# EAGLE board CD40106-4069-Synth (EAGLE 7.6.0)
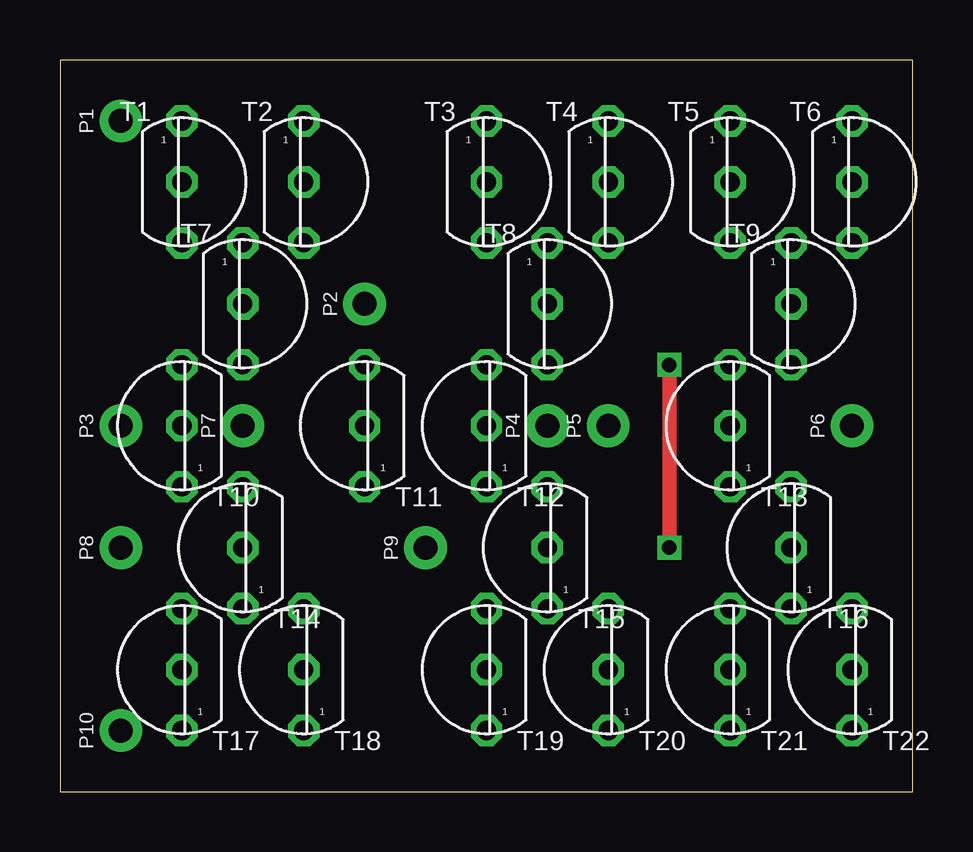
[diagram p0: board, top side]
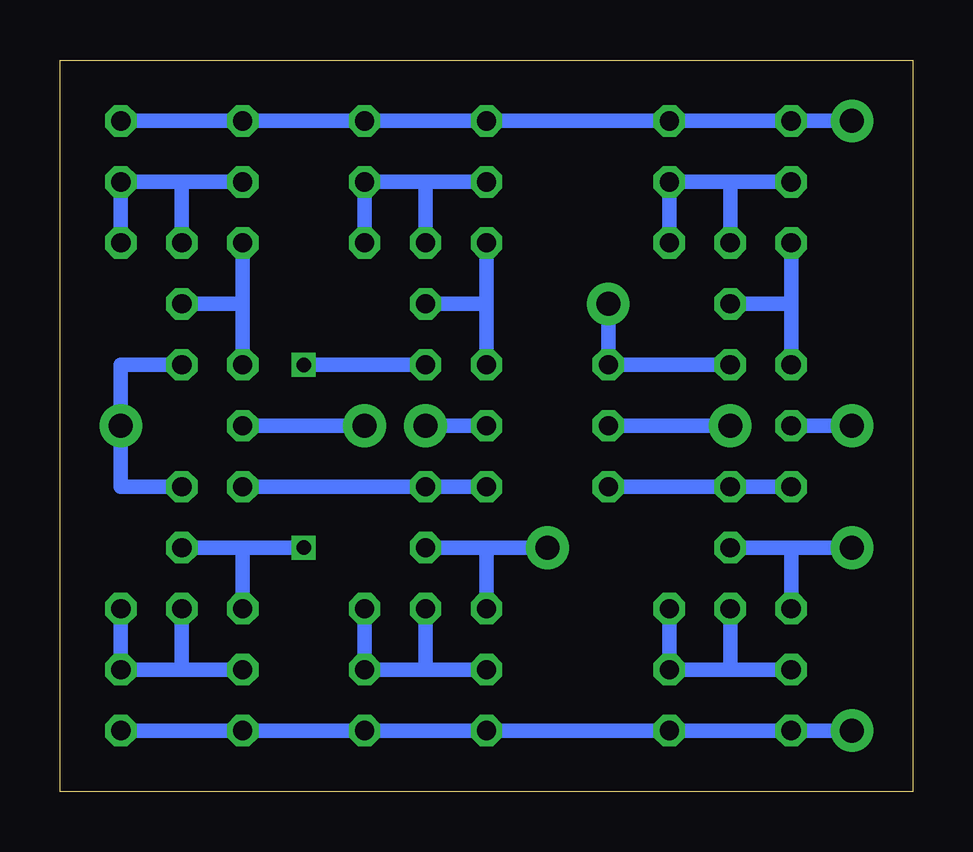
[diagram p1: board, bottom side, seen from below]

Size 35.56 x 30.48 mm. Coordinates in mm from the lower left corner, seen from the top.
Outline: 0,0 35.56,0 35.56,30.48 0,30.48 0,0
Copper layers (1*16): Top 0.035mm / dielectric 1.5mm / Bottom 0.035mm
Design rules "default": minimum track width 10mil, minimum drill 24mil, track to track 8mil, track to pad 8mil, pad to pad 8mil, via to via 8mil, smd to smd 8mil, copper to edge 40mil, drill to drill 8mil, minimum pad ring 10mil, minimum via ring 8mil, stop-mask expansion 4mil, vias tented up to drill 0mil, thermal gap 10mil

## Footprints (pad centres in the part's own frame; a part is rotated, then mirrored left to right if it is on the bottom)
SPAD = drill 1 pad 1.778: 1 0,0
TO92 = drill 0.8 octagon: 1 0,2.54; 2 0,0; 3 0,-2.54

## Placement (x,y rotation side)
P1  SPAD  [SPAD]  2.54,27.94 0 top
P2  SPAD  [SPAD]  12.7,20.32 0 top
P3  SPAD  [SPAD]  2.54,15.24 0 top
P4  SPAD  [SPAD]  20.32,15.24 0 top
P5  SPAD  [SPAD]  22.86,15.24 0 top
P6  SPAD  [SPAD]  33.02,15.24 0 top
P7  SPAD  [SPAD]  7.62,15.24 0 top
P8  SPAD  [SPAD]  2.54,10.16 0 top
P9  SPAD  [SPAD]  15.24,10.16 0 top
P10  SPAD  [SPAD]  2.54,2.54 0 top
T1  2N3906  [TO92]  5.08,25.4 0 top
T2  2N3906  [TO92]  10.16,25.4 0 top
T3  2N3906  [TO92]  17.78,25.4 0 top
T4  2N3906  [TO92]  22.86,25.4 0 top
T5  2N3906  [TO92]  27.94,25.4 0 top
T6  2N3906  [TO92]  33.02,25.4 0 top
T7  2N3906  [TO92]  7.62,20.32 0 top
T8  2N3906  [TO92]  20.32,20.32 0 top
T9  2N3906  [TO92]  30.48,20.32 0 top
T10  2N3904  [TO92]  5.08,15.24 180 top
T11  2N3904  [TO92]  12.7,15.24 180 top
T12  2N3904  [TO92]  17.78,15.24 180 top
T13  2N3904  [TO92]  27.94,15.24 180 top
T14  2N3904  [TO92]  7.62,10.16 180 top
T15  2N3904  [TO92]  20.32,10.16 180 top
T16  2N3904  [TO92]  30.48,10.16 180 top
T17  2N3904  [TO92]  5.08,5.08 180 top
T18  2N3904  [TO92]  10.16,5.08 180 top
T19  2N3904  [TO92]  17.78,5.08 180 top
T20  2N3904  [TO92]  22.86,5.08 180 top
T21  2N3904  [TO92]  27.94,5.08 180 top
T22  2N3904  [TO92]  33.02,5.08 180 top

## Library data of the parts
P1-P10 = pad
T1-T22 = t

## Nets
+15: P1.1 T1.1 T2.1 T3.1 T4.1 T5.1 T6.1
-15: P10.1 T17.1 T18.1 T19.1 T20.1 T21.1 T22.1
I_A: P8.1 T14.2 T17.3
I_B: P9.1 T15.2 T19.3
IN_A+: P3.1 T10.2
IN_A-: P7.1 T11.2
IN_B+: P5.1 T13.2
IN_B-: P4.1 T12.2
IO_A: P2.1 T7.3 T11.3
N$2: T1.2 T2.2 T2.3 T7.1
N$3: T1.3 T7.2 T10.3
N$5: T12.1 T13.1 T15.3
N$6: T3.2 T4.2 T4.3 T8.1
N$7: T3.3 T8.2 T12.3
N$8: T10.1 T11.1 T14.3
N$9: T8.3 T16.2 T21.3
N$10: T5.2 T6.2 T6.3 T9.1
N$11: T5.3 T9.2 T13.3
N$15: T14.1 T17.2 T18.2 T18.3
N$18: T15.1 T19.2 T20.2 T20.3
N$21: T16.1 T21.2 T22.2 T22.3
OB: P6.1 T9.3 T16.3

## Tracks (layer width: path | path; a pad name or v marks a point on that pad's centre or on a via)
+15
  Bottom 0.61: T6.1 T5.1 T4.1 T3.1 T2.1 T1.1 P1.1
-15
  Bottom 0.61: T22.1 T21.1 T20.1 T19.1 T18.1 T17.1 P10.1
I_A
  Bottom 0.61: P8.1 5.08,10.16 | T17.3 5.08,10.16 | 5.08,10.16 T14.2
I_B
  Bottom 0.61: P9.1 17.78,10.16 | T19.3 17.78,10.16 | 17.78,10.16 T15.2
IN_A+
  Bottom 0.61: P3.1 T10.2
IN_A-
  Bottom 0.61: P7.1 T11.2
IN_B+
  Bottom 0.61: P5.1 T13.2
IN_B-
  Bottom 0.61: P4.1 T12.2
IO_A
  Bottom 0.61: T7.3 T11.3 P2.1
N$2
  Bottom 0.61: 7.62,25.4 T2.2 T2.3 | T7.1 7.62,25.4 | 7.62,25.4 T1.2
N$3
  Bottom 0.61: 5.08,20.32 T10.3 | T7.2 5.08,20.32 | 5.08,20.32 T1.3
N$5
  Bottom 0.61: T12.1 T15.3 T13.1
N$6
  Bottom 0.61: 20.32,25.4 T4.2 T4.3 | T8.1 20.32,25.4 | 20.32,25.4 T3.2
N$7
  Bottom 0.61: 17.78,20.32 T12.3 | T8.2 17.78,20.32 | 17.78,20.32 T3.3
N$8
  Bottom 0.61: T10.1 T14.3 T11.1
N$9  (via drill 0.6)
  Top 0.61: v25.4,10.16 v25.4,17.78
  Bottom 0.61: 27.94,10.16 T21.3 | v25.4,17.78 T8.3 | T16.2 27.94,10.16 | 27.94,10.16 v25.4,10.16
N$10
  Bottom 0.61: 30.48,25.4 T6.2 T6.3 | T9.1 30.48,25.4 | 30.48,25.4 T5.2
N$11
  Bottom 0.61: 27.94,20.32 T13.3 | T5.3 27.94,20.32 | 27.94,20.32 T9.2
N$15
  Bottom 0.61: 7.62,5.08 T17.2 | T14.1 7.62,5.08 | 7.62,5.08 T18.2 T18.3
N$18
  Bottom 0.61: 20.32,5.08 T19.2 | T15.1 20.32,5.08 | 20.32,5.08 T20.2 T20.3
N$21
  Bottom 0.61: 30.48,5.08 T21.2 | T16.1 30.48,5.08 | 30.48,5.08 T22.2 T22.3
OB
  Bottom 0.61: T16.3 33.02,12.7 P6.1 33.02,17.78 T9.3